# Altium PCB PCB.PcbDoc
Units mm, origin at the board's own origin, x right, y up, seen from the top; angles counter-clockwise.
Board outline 48 x 48 mm, 2 copper layers (Top Layer, Bottom Layer); 43 components, 54 nets, 273 pads, 391 vias.
Unrouted connection lines stored in the file: 1.
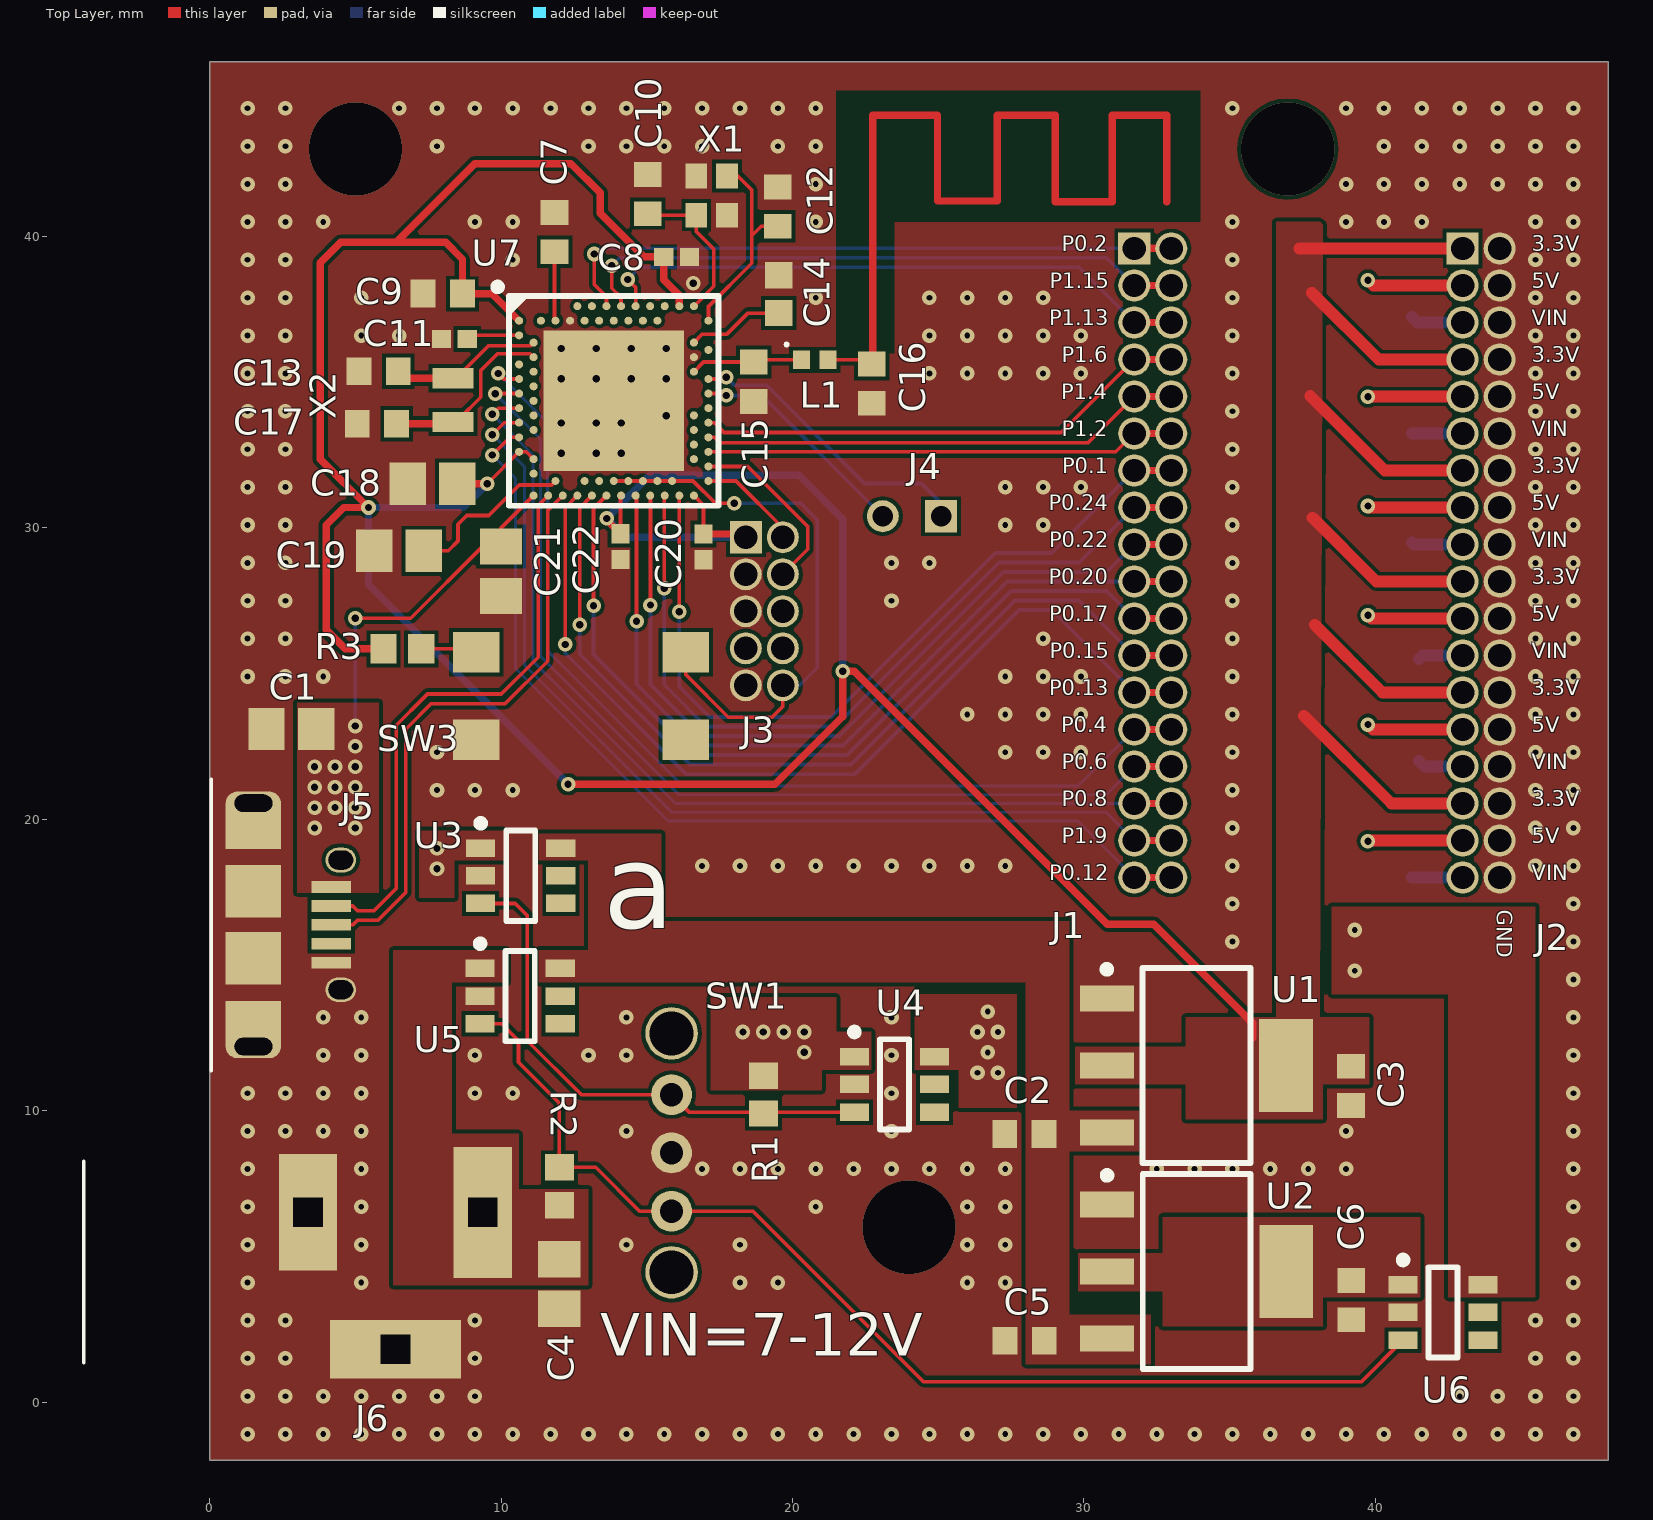
[diagram p0: Top Layer view]
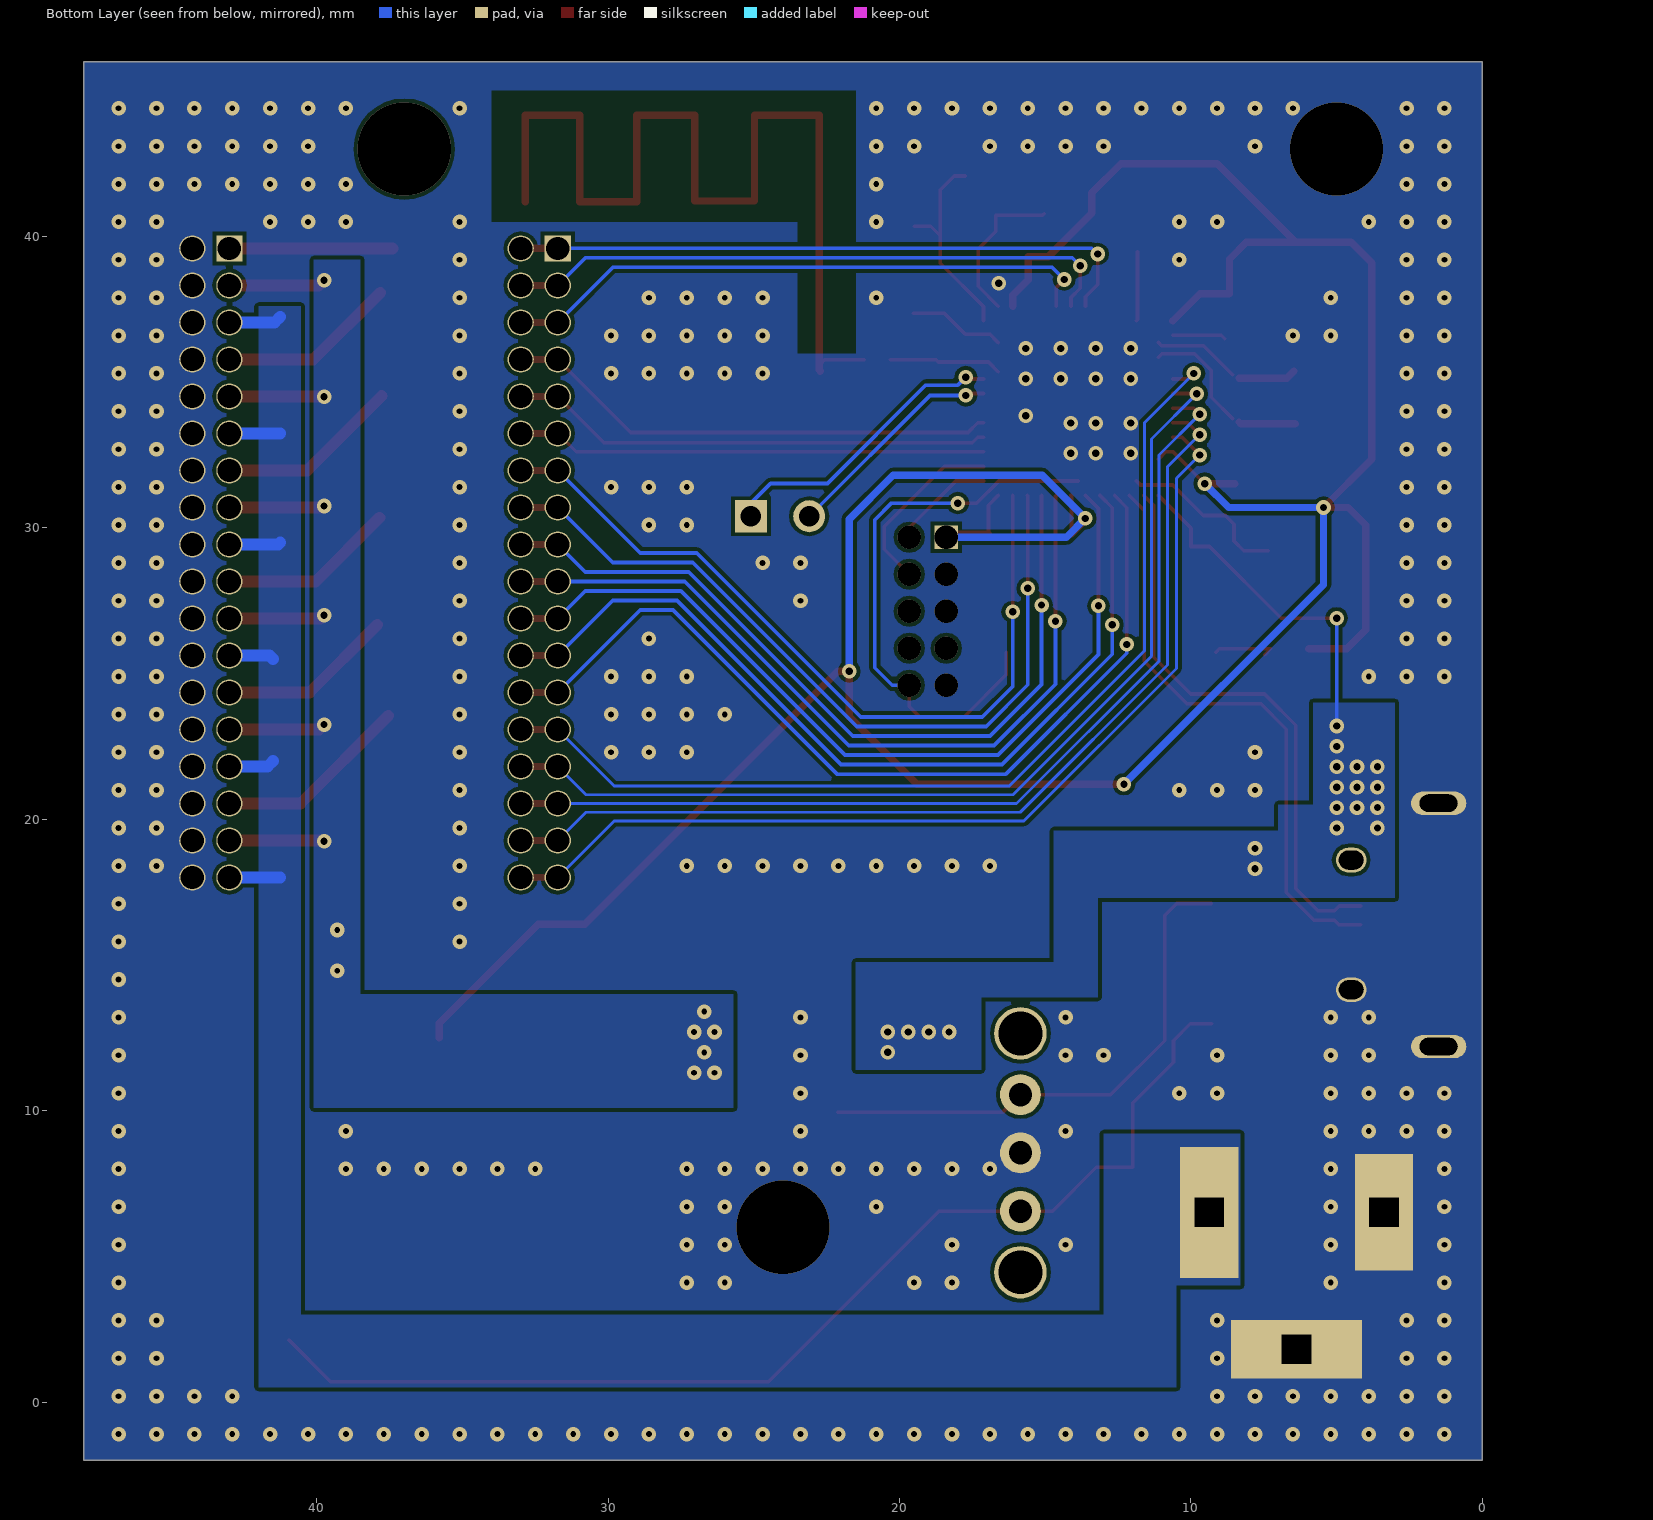
[diagram p1: Bottom Layer view, seen from below]
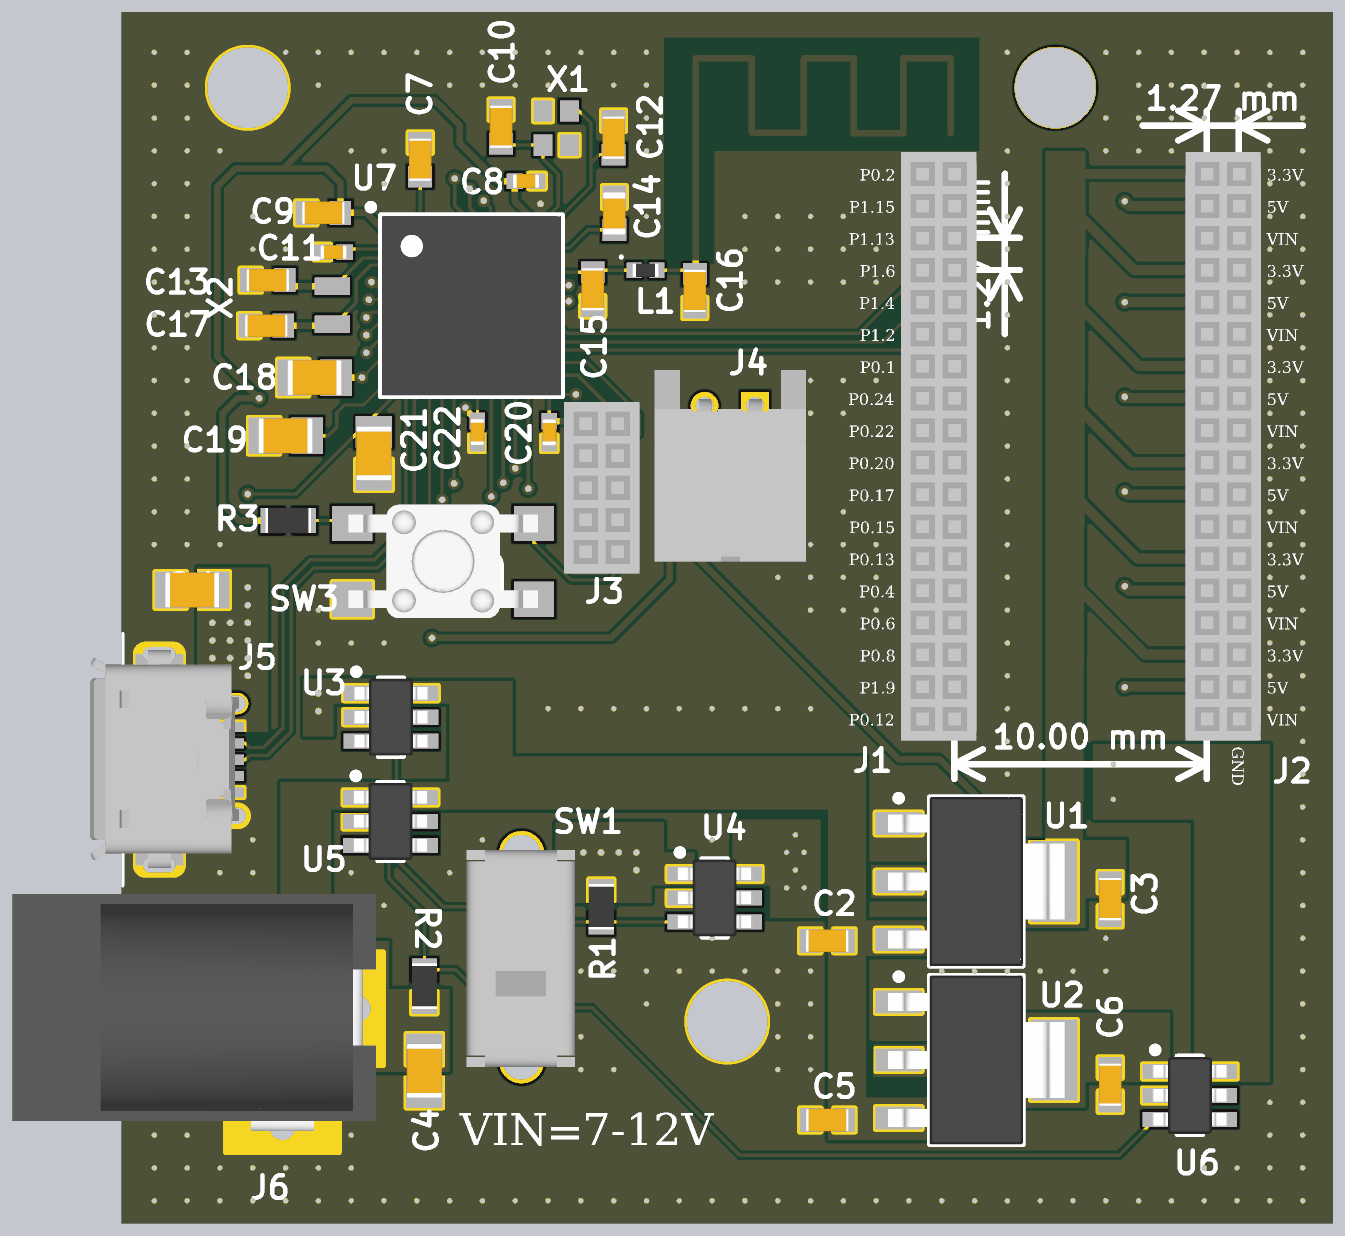
[diagram p2: 3D render of the assembled board from above, using the file's embedded part models]

## Layer stack, top to bottom
Top Solder: solder mask 0.0102, Solder Resist, Dk 3.5
Top Layer: signal copper 0.0356
Dielectric 1: dielectric 0.32, FR-4, Dk 4.8
Bottom Layer: signal copper 0.0356
Bottom Solder: solder mask 0.0102, Solder Resist, Dk 3.5

## Board outline
0,-2 48,-2 48,46 0,46

## Design rules (kind name [scope] priority, off if disabled: settings)
Clearance [All] p1: gap=0.127 ignorepadtopadclearanceinfootprint=FALSE except(0: Arc-Hole Track-Hole SMDPad-Hole THPad-Hole Via-Hole Fill-Hole Poly-Hole Region-Hole Text-Hole)
DiffPairsRouting [All] p1: maxlimit=0.2 minlimit=0.127 mostfreqgap=0.2 toplayer_minwidth=0.127 toplayer_maxwidth=0.2 toplayer_prefwidth=0.2 bottomlayer_minwidth=0.127 bottomlayer_maxwidth=0.2 bottomlayer_prefwidth=0.2 maxuncoupledlength=12.7
PlaneConnect [All] p1: planeconnectstyle=Direct reliefexpansion=0.508 reliefentries=4 reliefconductorwidth=0.254 reliefairgap=0.254
PolygonConnect [All] p1: connectstyle=Direct reliefconductorwidth=0.254 reliefentries=4 polygonreliefangle="90 Angle" airgapwidth=0.254
RoutingVias [All] p1: holewidth=0.25 width=0.5 viastyle="Through Hole" minholewidth=0.2 minwidth=0.45 maxholewidth=0.711 maxwidth=1.27
SolderMaskExpansion [All] p1: expansion=0.102
Width [All] p1: maxlimit=0.4 minlimit=0.089 preferedwidth=0.1
28 further rules are at their usual default settings.

## Classes and differential pairs
net class NFC: NFC_N NFC_P
net class P1.[0..15]: P1.1 P1.2 P1.3 P1.4 P1.5 P1.6 P1.7 P1.9 P1.10 P1.11 P1.12 P1.13 P1.14 P1.15
net class ANT: ANT
component class uController: C7 C8 C9 C10 C11 C12 C13 C14 C15 C16 C17 C18 C19 C20 C21 C22 L1 R3 SW3 U7 X1 X2
component class Power: C1 C2 C3 C4 C5 C6 J5 J6 R1 R2 SW1 U1 U2 U3 U4 U5 U6
component class Output: J1 J2 J3 J4
net class P0.[0..31]: P0.0 P0.1 P0.2 P0.3 P0.4 P0.5 P0.6 P0.7 P0.8 P0.9 P0.10 P0.11 P0.12 P0.13 P0.14 P0.15 P0.16 P0.17 P0.18 P0.19 P0.20 P0.21 P0.22 P0.23 P0.24 P0.25 P0.26 P0.27 P0.28 P0.29 P0.30 P0.31
net class USB: USB_N USB_P
differential pair NFC: +NFC_P -NFC_N
differential pair USB: +USB_P -USB_N

## Components (designator, comment, footprint, x,y, rotation, side; value= is the part's Value field where it differs from the comment)
C1 "CL21A475KAQNNNE" CAPC2013X14N 2.8,23.1 r0 top value=4.7uF
C2 "CL10A105KA8NNNC" CAPC1608X09N_2 27.962,9.2 r0 top value=1uF
C3 "CL10A105KA8NNNC" CAPC1608X09N_2 39.171,10.85 r90 top value=1uF
C4 "CL21A475KAQNNNE" CAPC2013X14N 12,4.05 r90 top value=4.7uF
C5 "CL10A105KA8NNNC" CAPC1608X09N_2 27.966,2.1 r0 top value=1uF
C6 "CL10A105KA8NNNC" CAPC1608X09N_2 39.175,3.5 r90 top value=1uF
C7 "CL10A105KA8NNNC" CAPC1608X09N_2 11.835,40.15 r270 top value=1uF
C8 "CL05A104KA5NNNC" CAPC1005X06N 16.025,39.3 r0 top value=100nF
C9 "CL10A105KA8NNNC" CAPC1608X09N_2 8,38.042 r0 top value=1uF
C10 "CL10C120JB8NNNC" CAPC1608X09N_2 15.038,41.454 r90 top value=12pF
C11 "CL05A104KA5NNNC" CAPC1005X06N 8.4,36.488 r180 top value=100nF
C12 "CL10C120JB8NNNC" CAPC1608X09N_2 19.5,41.025 r90 top value=12pF
C13 "CL10C120JB8NNNC" CAPC1608X09N_2 5.796,35.375 r0 top value=12pF
C14 "885012206028" CAPC1608X09N 19.525,38.021 r90 top value=100pF
C15 "CL10C0R8BB8NNNC" CAPC1608X09N_2 18.671,35.016 r90 top value=0.8pF
C16 "CL10C0R5BB8NNNC" CAPC1608X09N_2 22.717,34.95 r270 top value=0.5pF
C17 "CL10C120JB8NNNC" CAPC1608X09N_2 5.739,33.571 r0 top value=12pF
C18 "CL21A475KAQNNNE" CAPC2013X14N 7.65,31.516 r0 top value=4.7uF
C19 "CL21A475KAQNNNE" CAPC2013X14N 6.5,29.212 r0 top value=4.7uF
C20 "CL05A104KA5NNNC" CAPC1005X06N 16.95,29.35 r270 top value=100nF
C21 "CL21A475KAQNNNE" CAPC2013X14N 10,28.512 r90 top value=4.7uF
C22 "CL05A104KA5NNNC" CAPC1005X06N 14.1,29.355 r270 top value=100nF
J1 "20021311-00036T4LF" DIP36 31.73,39.59 r0 top
J2 "20021311-00036T4LF" DIP36 43,39.59 r0 top
J3 "20021311-00010T4LF" DIP10 18.4,29.678 r0 top
J4 "0894010210" DIP2 25.1,30.4 r180 top
J5 "47589-0001" USB 0.05,16.375 r270 top
J6 "PJ-202B" POWER_JACK 9.875,8.257 r180 top
L1 "CIH05T3N3SNC" INDC1005X06N 20.763,35.769 r0 top value=3.3nH
R1 "RR0816P-103-D" RESC1608X05N 19.004,10.55 r90 top value=10k
R2 "RR0816P-103-D" RESC1608X05N 12,7.404 r270 top value=10k
R3 "RR0816P-103-D" RESC1608X05N 6.612,25.85 r180 top value=10k
SW1 "OS102011MS2QN1" DIP5-SW 15.85,10.55 r270 top
SW3 "EG5350TR-ND" SW1 8.343,22.031 r0 top
U1 "AZ1117EH-3.3TRG1" SOT230P700X180-4N 33.866,11.55 r0 top
U2 "AZ1117EH-5.0TRG1" SOT230P700X180-4N 33.871,4.479 r0 top
U3 "TPS22810DBVR" SOT23127P600-8N-TPS22810DBVR 10.675,18.06 r0 top
U4 "TPS22810DBVR" SOT23127P600-8N-TPS22810DBVR 23.5,10.9 r0 top
U5 "TPS22810DBVR" SOT23127P600-8N-TPS22810DBVR 10.656,13.931 r0 top
U6 "TPS22810DBVR" SOT23127P600-8N-TPS22810DBVR 42.329,3.075 r0 top
U7 "NRF52840-QIAA-R" AQFN50P700X700X85_HS-74N 13.867,34.359 r0 top
X1 "NX2016SA-32MHZ-EXS00A-CS11336" OSC1 18.125,40.304 r90 top value=32MHz
X2 "Q0,032768-JTX210-9-20-T1-80K-LF" OSC2 9.05,33.283 r90 top value=32.768kHz

## Footprints (in the part's own frame and the unit in brackets; to place one, negate y for a bottom-side part, rotate by r counter-clockwise, add the part's x,y. Pads: shape width x height; smd on the part's side, far side on the other; paste and mask are expansions set on the pad)
AQFN50P700X700X85_HS-74N [mm]
  round 0.275 smd paste+0.012 mask+0.05: A8(-1.25,3.25) A10(-0.75,3.25) A12(-0.25,3.25) A14(0.25,3.25) A16(0.75,3.25) A18(1.25,3.25) A20(1.75,3.25) A22(2.25,3.25) A23(2.75,3.25) AA24(3.25,-2.25) AB2(-2.75,-2.5) AC5(-2,-2.75) AC9(-1,-2.75) AC11(-0.5,-2.75) AC13(0,-2.75) AC15(0.5,-2.75) AC17(1,-2.75) AC19(1.5,-2.75) AC21(2,-2.75) AC24(3.25,-2.75) AD2(-2.75,-3.25) AD4(-2.25,-3.25) AD6(-1.75,-3.25) AD8(-1.25,-3.25) AD10(-0.75,-3.25) AD12(-0.25,-3.25) AD14(0.25,-3.25) AD16(0.75,-3.25) AD18(1.25,-3.25) AD20(1.75,-3.25) AD22(2.25,-3.25) AD23(2.75,-3.25) B1(-3.25,2.75) B3(-2.5,2.75) B5(-2,2.75) B7(-1.5,2.75) B9(-1,2.75) B11(-0.5,2.75) B13(0,2.75) B15(0.5,2.75) B17(1,2.75) B19(1.5,2.75) B24(3.25,2.75) C1(-3.25,2.25) D2(-2.75,2) D23(2.75,2) E24(3.25,1.75) F2(-2.75,1.5) F23(2.75,1.5) G1(-3.25,1.25) H2(-2.75,1) H23(2.75,1) J1(-3.25,0.75) J24(3.25,0.75) K2(-2.75,0.5) L1(-3.25,0.25) L24(3.25,0.25) M2(-2.75,0) N1(-3.25,-0.25) N24(3.25,-0.25) P2(-2.75,-0.5) P23(2.75,-0.5) R1(-3.25,-0.75) R24(3.25,-0.75) T2(-2.75,-1) T23(2.75,-1) U1(-3.25,-1.25) U24(3.25,-1.25) V23(2.75,-1.5) W1(-3.25,-1.75) W24(3.25,-1.75) Y2(-2.75,-2) Y23(2.75,-2)
  rect 4.83x4.83 smd mask+0.05: B7(0,0)
  silkscreen extent -4.11,-3.6 3.6,4.04, body extent -3.55,-3.55 3.55,3.55, height 0.85
CAPC1005X06N [mm] "Chip Capacitor, 2-Leads, Body 1,00x0,50mm, IPC Medium Density"
  rect 0.66x0.62 smd: 1(-0.44,0) 2(0.44,0)
  body extent -0.53,-0.28 0.53,0.28, height 0.55
CAPC1608X09N [mm] "Chip Capacitor, 2-Leads, Body 1,60x0,80mm, IPC Medium Density"
  rect 0.9x0.95 smd: 1(-0.65,0) 2(0.65,0)
  body extent -0.85,-0.45 0.85,0.45, height 0.87
CAPC1608X09N_2 [mm] "Chip Capacitor, 2-Leads, Body 1,60x0,80mm, IPC Medium Density"
  rect 0.85x0.95 smd: 1(-0.675,0) 2(0.675,0)
  body extent -0.85,-0.45 0.85,0.45, height 0.9
CAPC2013X14N [mm] "Chip Capacitor, 2-Leads, Body 2,00x1,27mm, IPC Medium Density"
  rect 1.25x1.45 smd: 1(-0.85,0) 2(0.85,0)
  body extent -1.07,-0.7 1.07,0.7, height 1.4
DIP2 [mm]
  rect 1.1x1.1 / inner rect 2.5x1.2 / far side rect 1.1x1.1 hole 0.7: 1(0,0)
  round 1.1 / inner oval 2.5x1.2 / far side round 1.1 hole 0.7: 2(2,0)
  body extent -2.02,-1.43 3.97,6.18, height 5.02
DIP5-SW [mm]
  round 1.4 hole 0.8: 1(0,0) 2(2,0) 3(4,0)
  round 1.8 hole 1.5: M(-2.1,0) M(6.1,0)
  body extent -2.25,-2.18 6.35,2.12, height 8.7
DIP10 [mm]
  rect 1.1x1.1 / inner rect 2.5x1.2 / far side rect 0.8x0.8 hole 0.8: 1(0,0)
  round 1.1 / inner oval 2.5x1.2 / far side round 0.8 hole 0.8: 2(0,-1.27) 3(0,-2.54) 4(0,-3.81) 5(0,-5.08) 6(1.27,-5.08) 7(1.27,-3.81) 8(1.27,-2.54) 9(1.27,-1.27) 10(1.27,0)
  body extent -0.88,-5.93 2.13,0.88, height 4.3
DIP36 [mm]
  rect 1.1x1.1 / inner rect 2.5x1.2 / far side rect 0.9x0.9 hole 0.8: 1(0,0)
  round 1.1 / inner oval 2.5x1.2 / far side round 0.9 hole 0.8: 2(0,-1.27) 3(0,-2.54) 4(0,-3.81) 5(0,-5.08) 6(0,-6.35) 7(0,-7.62) 8(0,-8.89) 9(0,-10.16) 10(0,-11.43) 11(0,-12.7) 12(0,-13.97) 13(0,-15.24) 14(0,-16.51) 15(0,-17.78) 16(0,-19.05) 17(0,-20.32) 18(0,-21.59) 19(1.27,-21.59) 20(1.27,-20.32) 21(1.27,-19.05) 22(1.27,-17.78) 23(1.27,-16.51) 24(1.27,-15.24) 25(1.27,-13.97) 26(1.27,-12.7) 27(1.27,-11.43) 28(1.27,-10.16) 29(1.27,-8.89) 30(1.27,-7.62) 31(1.27,-6.35) 32(1.27,-5.08) 33(1.27,-3.81) 34(1.27,-2.54) 35(1.27,-1.27) 36(1.27,0)
  body extent -0.85,-22.46 2.15,0.86, height 4.3
INDC1005X06N [mm] "Chip Inductor, 2-Leads, Body 1,00x0,50mm, IPC Medium Density"
  rect 0.59x0.62 smd: 1(-0.455,0) 2(0.455,0)
  silkscreen extent -1.01,0.47 -0.91,0.57, body extent -0.53,-0.28 0.53,0.28, height 0.55
OSC1 [mm]
  rect 0.85x0.75 smd: 1(0.425,0.375) 2(1.775,0.375) 3(1.775,1.425) 4(0.425,1.425)
OSC2 [mm]
  rect 0.7x1.4 smd: 1(0.35,0.7) 2(1.85,0.7)
POWER_JACK [mm]
  rect 2x4.5 hole 1 square unplated: 1(0.5,1.75)
  rect 2x4 hole 1 square unplated: 2(6.5,1.75)
  rect 4.5x2 hole 1 square unplated: 3(3.5,6.45)
  silkscreen extent 14.2,0 14.2,6.9, body extent -0.2,-2.8 14.2,6.6, height 11
RESC1608X05N [mm] "Chip Resistor, 2-Leads, Body 1,60x0,80mm, IPC Medium Density"
  rect 0.9x1 smd: 1(-0.65,0) 2(0.65,0)
  body extent -0.9,-0.5 0.9,0.5, height 0.5
SOT230P700X180-4N [mm] "SOT223, 4-Leads, Body 6,50x7,00mm (avg), Pitch 2,30mm, IPC Medium Density"
  rect 1.85x0.9 smd: 1(-3.075,2.3) 2(-3.075,0) 3(-3.075,-2.3)
  rect 1.85x3.2 smd: 2(3.075,0)
  silkscreen extent -3.2,-3.35 1.85,3.42, body extent -3.5,-3.35 3.5,3.35, height 1.8
SOT23127P600-8N-TPS22810DBVR [mm]
  rect 1x0.6 smd: 1(-1.375,0.95) 2(-1.375,0) 3(-1.375,-0.95) 4(1.375,-0.95) 5(1.375,0) 6(1.375,0.95)
  silkscreen extent -1.5,-1.55 0.5,1.92, body extent -1.49,-1.53 1.49,1.53, height 1.45
SW1 [mm]
  rect 1.6x1.4 smd: 1(0.8,0.7) 2(8,0.7) 3(0.8,3.7) 4(8,3.7)
  body extent 0.65,-0.05 8.15,4.45, height 3.7
USB [mm]
  rect 0.4x1.35 smd: 1(-1.3,4.125) 2(-0.65,4.125) 3(0,4.125) 4(0.65,4.125) 5(1.3,4.125)
  oval 0.8x1.9 hole 0.6 slot 1.3 at 90 deg unplated: 5(-4.175,1.45) 5(4.175,1.45)
  rect 1.575x1.9 smd: 5(-3.4,1.45) 5(3.4,1.45)
  oval 0.85x1.05 hole 0.65 slot 0.85 at 90 deg unplated: 5(-2.225,4.45) 5(2.225,4.45)
  rect 1.8x1.9 smd: 5(-1.15,1.45) 5(1.15,1.45)
  silkscreen extent -5,0 5,0, body extent -4.35,-1.29 4.3,4.6, height 2.86

## Part data
C1 C4 C18 C19 C21: "Cap Ceramic 4.7uF 25V X5R 10% SMD 0805 85C Embossed T/R", Capacitance=4.7uF, Case/Package=0805, Case Code (Metric)=2012, Dielectric=X5R, Manufacturer=Samsung, Max Operating Temperature=85°C, Min Operating Temperature=-55°C, Package Quantity=1, Supplier Part Number 1=1276-1244-1-ND, Tolerance=10%, Voltage Rating=25V, Case Code (Imperial)=0805, Depth=1.25mm, Height=1.25mm, Lead Free="Lead Free", Length=2mm, Manufacturer Part Number=CL21A475KAQNNNE, Mount="Surface Mount", Packaging="Tape and Reel", Pricing 1="1=0.23, 10=0.158, 100=0.0802, 500=0.0549, 1000=0.0485 (USD)", Radiation Hardening=No, Stock 1=20000, Supplier 1=Digi-Key, Thickness=0.055inch, Voltage Rating (DC)=25V, Width=0.049inch
C2 C3 C5 C6 C7 C9: "Cap Ceramic 1uF 25V X5R 10% SMD 0603 85C Paper T/R", Capacitance=1uF, Case/Package=0603, Case Code (Metric)=1608, Dielectric=X5R, Manufacturer=Samsung, Max Operating Temperature=85°C, Min Operating Temperature=-55°C, Package Quantity=1, Supplier Part Number 1=1276-1102-1-ND, Tolerance=10%, Voltage=25V, Case Code (Imperial)=0603, Contact Plating=Tin, Depth=0.8mm, Height=0.8mm, Lead Free="Lead Free", Length=1.6mm, Manufacturer Part Number=CL10A105KA8NNNC, Material=Ceramic, Mount="Surface Mount", Packaging="Tape and Reel", Pricing 1="1=0.1, 10=0.052, 100=0.0231, 500=0.0165, 1000=0.013 (USD)", Radiation Hardening=No, Stock 1=40000, Supplier 1=Digi-Key, Thickness=0.035inch, Voltage Rating=25V, Voltage Rating (DC)=25V, Width=0.031inch
C8 C11 C20 C22: "Cap Ceramic 0.1uF 25V X5R 10% SMD 0402 85C Paper T/R", Capacitance=100nF, Case/Package=0402, Case Code (Metric)=1005, Dielectric=X5R, Manufacturer=Samsung, Max Operating Temperature=85°C, Min Operating Temperature=-55°C, Package Quantity=1, Supplier Part Number 1=1276-1043-1-ND, Tolerance=10%, Voltage=25V, Case Code (Imperial)=0402, Depth=0.5mm, Height=0.5mm, Lead Free="Lead Free", Length=1mm, Manufacturer Part Number=CL05A104KA5NNNC, Mount="Surface Mount", Packaging="Tape and Reel", Pricing 1="1=0.1, 10=0.04, 100=0.0176, 500=0.0126, 1000=0.0099, 2500=0.009, 5000=0.0083 (USD)", Radiation Hardening=No, Stock 1=100000, Supplier 1=Digi-Key, Thickness=0.022inch, Voltage Rating=25V, Voltage Rating (DC)=25V, Width=0.02inch
C10 C12 C13 C17: "Cap Ceramic 12pF 50V C0G 5% SMD 0603 125C Paper T/R", Capacitance=12pF, Case/Package=0603, Case Code (Metric)=1608, Dielectric=C0G, Manufacturer=Samsung, Max Operating Temperature=125°C, Min Operating Temperature=-55°C, Package Quantity=1, Supplier Part Number 1=1276-1254-1-ND, Temperature Coefficient=300ppm/°C, Tolerance=5%, Voltage=50V, Case Code (Imperial)=0603, Contact Plating=Tin, Depth=0.8mm, Height=0.8mm, Lead Free="Lead Free", Length=1.6mm, Manufacturer Part Number=CL10C120JB8NNNC, Material=Ceramic, Mount="Surface Mount", Packaging="Tape and Reel", Pricing 1="1=0.1, 10=0.07, 100=0.0314, 500=0.0224, 1000=0.0176 (USD)", Radiation Hardening=No, Stock 1=40000, Supplier 1=Digi-Key, Thickness=0.035inch, Voltage Rating=50V, Voltage Rating (DC)=50V, Width=0.031inch
C14: "Wurth Elektronik 0603 WCAP-CSGP 100pF Ceramic Multilayer Capacitor, 16 V dc, +125°C, X7R Dielectric, ±10%", Capacitance=100pF, Case/Package=0603, Case Code (Metric)=1608, Manufacturer="Wurth Electronics", Max Operating Temperature=125°C, Min Operating Temperature=-55°C, Supplier Part Number 1=732-7947-1-ND, Tolerance=10%, Voltage Rating=16V, Case Code (Imperial)=0603, Length=0.063inch, Manufacturer Part Number=885012206028, Mount="Surface Mount", Packaging="Tape and Reel", Pricing 1="1=0.1, 10=0.021, 100=0.0192, 500=0.017 (USD)", Stock 1=4208, Supplier 1=Digi-Key, Thickness=0.034inch, Width=0.031inch
C15: "Cap Ceramic 0.8pF 50V C0G 0.1pF SMD 0603 125C Paper T/R", Capacitance=0.8pF, Case/Package=0603, Case Code (Metric)=1608, Dielectric=C0G, Manufacturer=Samsung, Max Operating Temperature=125°C, Min Operating Temperature=-55°C, Package Quantity=1, Supplier Part Number 1=1276-2148-1-ND, Voltage Rating=50V, Case Code (Imperial)=0603, Depth=0.8mm, Height=0.8mm, Length=1.6mm, Manufacturer Part Number=CL10C0R8BB8NNNC, Mount="Surface Mount", Packaging="Tape and Reel", Pricing 1="1=0.1, 10=0.059, 100=0.0264, 500=0.0189, 1000=0.0148 (USD)", Radiation Hardening=No, Stock 1=40000, Supplier 1=Digi-Key, Thickness=0.035inch, Voltage Rating (DC)=50V, Width=0.031inch
C16: "Cap Ceramic 0.5pF 50V C0G 0.1pF SMD 0603 125C Paper T/R", Capacitance=0.5pF, Case/Package=0603, Case Code (Metric)=1608, Dielectric=NP0, Manufacturer=Samsung, Max Operating Temperature=125°C, Min Operating Temperature=-55°C, Package Quantity=1, Supplier Part Number 1=1276-1818-1-ND, Temperature Coefficient=300ppm/°C, Voltage=50V, Case Code (Imperial)=0603, Contact Plating=Matte,Tin, Depth=0.8mm, Height=0.8mm, Length=1.6mm, Manufacturer Part Number=CL10C0R5BB8NNNC, Material=Ceramic, Mount="Surface Mount", Packaging="Tape and Reel", Pricing 1="1=0.1, 10=0.049, 100=0.0217, 500=0.0155, 1000=0.0122 (USD)", Radiation Hardening=No, Stock 1=28897, Supplier 1=Digi-Key, Thickness=0.035inch, Voltage Rating=50V, Width=0.031inch
J1 J2: "36 Position Receptacle Connector 0.050\" (1.27mm) Through Hole Gold", Colour=Black, Contact Resistance=30mR, Current Rating=1A, Manufacturer="Amphenol FCI", Max Operating Temperature=85°C, Max Voltage Rating (AC)=125V, Min Operating Temperature=-40°C, Package Quantity=25, Supplier Part Number 1=609-3765-ND, Checked=false, Connector Type=Receptacle,Socket, Contact Material="Copper Alloy", Contact Plating=Gold, Depth=3mm, Gender=Female, Housing Material=Plastic, Length=21.59mm, Manufacturer Part Number=20021311-00036T4LF, Mount="Through Hole", Number of Contacts=36, Number of Positions=36, Number of Rows=2, Orientation=Straight, Packaging=Rail/Tube, Pitch=1.27mm, Pricing 1="1=2.66, 25=2.3368, 100=2.1242, 500=1.8056, 1000=1.5401, 5000=1.3807 (USD)", Row Spacing=0.05inch, Stock 1=859, Supplier 1=Digi-Key, Termination=Solder, Voltage Rating=125V
J3: "10 Position Receptacle Connector 0.050\" (1.27mm) Through Hole Gold", Colour=Black, Contact Resistance=30mR, Current Rating=1A, Flammability Rating="UL94 V-0", Insulation Resistance=1GR, Manufacturer="Amphenol FCI", Max Operating Temperature=125°C, Max Voltage Rating (AC)=125V, Min Operating Temperature=-55°C, Package Quantity=86, Supplier Part Number 1=609-3754-ND, Checked=False, Connector Type=Receptacle,Socket, Contact Gender=Male, Contact Material="Copper,Copper Alloy,Gold", Contact Plating=Gold, Depth=3mm, Gender=Receptacle, Housing Material=Thermoplastic, Lead Free="Lead Free", Length=5.08mm, Manufacturer Part Number=20021311-00010T4LF, Mount="Through Hole", Number of Contacts=10, Number of Positions=10, Number of Rows=2, Orientation=Straight, Packaging=Rail/Tube, Pitch=1.27mm, Pricing 1="1=1.03, 86=0.8154, 172=0.7799, 516=0.6381, 1032=0.5672, 5074=0.4963, 10062=0.4715 (USD)", REACH SVHC="No SVHC", Row Spacing=0.05inch, Stock 1=21801, Supplier 1=Digi-Key, Termination=Solder, Termination Post Length=2.4mm, Voltage Rating=125V
J4: "Conn Shrouded Header HDR 2 POS 2mm Solder RA Thru-Hole Bag", Colour=Natural, Manufacturer=Molex, Max Operating Temperature=85°C, Min Operating Temperature=-25°C, Package Quantity=9000, Supplier Part Number 1=WM14854-ND, Checked=False, Connector Type="Male Pin", Contact Material=Brass, Contact Plating=Copper,Tin, Depth=7.6mm, Housing Colour=Natural, Housing Material=Nylon, Length=6mm, Manufacturer Part Number=0894010210, Mount="Through Hole", Number of Contacts=2, Number of Positions=2, Number of Rows=1, Orientation="Right Angle", Packaging=Bulk, Pitch=2mm, Pricing 1="1=0.13, 10=0.123, 100=0.0757, 500=0.0626, 1000=0.0548, 5000=0.047, 10000=0.0457 (USD)", Radiation Hardening=No, Stock 1=9337, Supplier 1=Digi-Key, Termination=Solder
J5: "MOLEX         47589-0001            MICRO USB, 2.0 TYPE AB, RECEPTACLE, SMT", Colour=Black, Contact Resistance=40mR, Current Rating=1.8A, Manufacturer=Molex, Max Operating Temperature=85°C, Max Voltage Rating (AC)=100V, Min Operating Temperature=-20°C, Supplier Part Number 1=WM17143CT-ND, Voltage Rating=30V, Checked=False, Connector Type=Receptacle,USB, Contact Material="Copper,Copper Alloy", Contact Plating=Gold, Gender=Female, Height=0.25inch, Housing Material=Polymer, Length=8.65mm, Manufacturer Part Number=47589-0001, Mount="PCB,Surface Mount", Number of Contacts=5, Number of Ports=1, Number of Terminals=5, Orientation="Right Angle", Packaging="Tape and Reel", Pitch=0.65mm, Pricing 1="1=0.74, 10=0.649, 25=0.6108, 50=0.5854, 100=0.56, 250=0.5091, 500=0.4582 (USD)", Radiation Hardening=No, REACH SVHC=Unknown, Stock 1=66825, Supplier 1=Digi-Key, Termination=Solder, USB Standard="USB 2.0", Voltage Rating (AC)=30V, Weight=0.01lb, Width=0.25inch
J6: "PJ-202 Series 2.5 x 6.5 mm 16 V Horizontal Power Jack w/ Kinked Pins", Colour=Black, Current Rating=2.5A, Flammability Rating="UL94 V-0", Insulation Resistance=100MR, Manufacturer=CUI, Max Operating Temperature=85°C, Min Operating Temperature=-25°C, Package Quantity=500, Supplier Part Number 1=CP-202B-ND, Voltage Rating=24V, Connector Type=Jack, Contact Gender=Male, Contact Material=Copper, Contact Plating=Nickel, Diameter=2.5mm, Gender=Male, Housing Colour=Black, Housing Material=Thermoplastic, Lead Free="Lead Free", Manufacturer Part Number=PJ-202B, Mount="Through Hole", Number of Conductors=2, Orientation=Horizontal, Packaging=Bulk, Pricing 1="1=0.61, 10=0.57, 25=0.5132, 50=0.456, 100=0.437, 250=0.399, 500=0.38, 1000=0.3135, 2500=0.285 (USD)", Shielding=Unshielded, Stock 1=39597, Supplier 1=Digi-Key, Termination="Through Hole"
L1: "Inductor High Frequency Chip Multi-Layer 3.3nH 0.3nH 100MHz 8Q-Factor Ceramic 300mA 190mOhm DCR 0402 T/R", Case/Package=0402, Case Code (Metric)=1005, Current Rating=300mA, DC Resistance (DCR)=190mR, Inductance=3.3nh, Manufacturer=Samsung, Max Operating Temperature=125°C, Min Operating Temperature=-55°C, Self Resonant Frequency=6GHz, Supplier Part Number 1=1276-6294-1-ND, Test Frequency=100MHz, Case Code (Imperial)=0402, Core Material=Ceramic, DC Current=300mA, Depth=0.55mm, Height=0.55mm, Lead Free="Lead Free", Length=0.039inch, Manufacturer Part Number=CIH05T3N3SNC, Max DC Current=300mA, Military Standard=Not, Mount="Surface Mount", Packaging="Cut Tape", Pricing 1="1=0.1, 10=0.015, 100=0.0102, 500=0.0082, 1000=0.007, 2500=0.0063 (USD)", Radiation Hardening=No, Shielding=Unshielded, Stock 1=68140, Supplier 1=Digi-Key, Width=0.02inch
R1 R2 R3: "RES SMD 10K OHM 0.5% 1/16W 0603", Manufacturer=Susumu, Operating Temperature="-55°C ~ 125°C", Package / Case="0603 (1608 Metric)", Power (Watts)="0.063W, 1/16W", Supplier Device Package=-, Supplier Part Number 1=RR08P10.0KDCT-ND, Temperature Coefficient=±25ppm/°C, Tolerance=±0.5%, Category=Resistors, ComponentLink1Description=http://www.susumu.co.jp/common/pdf/n_catalog_partition05_en.pdf, ComponentLink1URL=http://www.susumu.co.jp/common/pdf/n_catalog_partition05_en.pdf, Composition="Thin Film", Failure Rate=-, Features=-, Height - Seated (Max)="0.020\" (0.50mm)", Manufacturer Part Number=RR0816P-103-D, Packaging="Cut Tape (CT)", Part Status=Active, Pricing 1="1=0.09, 10=0.084, 100=0.0321, 1000=0.01412, 2500=0.01219 (EUR)", RoHS="RoHS Compliant", Size / Dimension="0.063\" L x 0.032\" W (1.60mm x 0.80mm)", Stock 1=362461, Supplier 1=Digi-Key
SW1: "C & K COMPONENTS         OS102011MS2QN1             Slide Switch, SPDT, On-On, Through Hole, OS Series, 100 mA", Contact Current Rating=100mA, Contact Resistance=20mR, Insulation Resistance=100MR, Manufacturer="ITT C&K", Max Operating Temperature=70°C, Max Voltage Rating (DC)=12V, Min Operating Temperature=-30°C, Package Quantity=300, Supplier Part Number 1=CKN9565-ND, Actuator Length=4mm, Actuator Material=Acetal,Polyacetal,Polyoxymethylene, Actuator Type=Standard, Contact Material="Brass,Copper Alloy,Silver", Contact Plating=Gold,Silver, Contact Style=Non-Shorting, Current Rating=100mA, Depth=4.3mm, Electrical Life=10000Cycles, Housing Material=Resin, Lead Free="Lead Free", Length=8.6mm, Manufacturer Part Number=OS102011MS2QN1, Max Current Rating=100mA, Mechanical Life=10000Cycles, Mount="PCB,Through Hole", Orientation=Vertical, Packaging=Bulk, Pricing 1="1=0.43, 10=0.413, 25=0.4048, 50=0.3616, 100=0.3444, 250=0.3358, 500=0.2841, 1000=0.2755, 5000=0.2411 (USD)", Radiation Hardening=No, REACH SVHC="No SVHC", Stock 1=29366, Supplier 1=Digi-Key, Switch Function=On-On, Switch Travel=2mm, Termination="PC Pins", Throw Configuration=SPDT, Voltage Rating (DC)=12V
SW3: library part TL3305AF160QG, "SWITCH TACTILE SPST-NO 50MA 12V", Contact Rating @ Voltage="0.05A @ 12VDC", Illumination Type, Color=-, Manufacturer=E-Switch, Operating Force=160gf, Operating Temperature="-20°C ~ 70°C", Actuator Height off PCB, Vertical=3.80mm, Actuator Length, Right Angle=-, Actuator Material=-, Actuator Orientation="Top Actuated", Actuator Type=Standard, Category=Switches, Checked=0, Circuit=SPST-NO, ComponentLink1Description=http://spec_sheets.e-switch.com/specs/P010468.pdf, ComponentLink1URL=http://spec_sheets.e-switch.com/specs/P010468.pdf, Features=-, Illumination=Non-Illuminated, Illumination Voltage (Nominal)=-, Ingress Protection=-, Manufacturer Part Number=TL3305AF160QG, Mechanical Life="500,000 Cycles", Mounting Type="Surface Mount", Outline="4.50mm x 4.50mm", Packaging="Tape & Reel (TR)", Part Status=Active, Pricing 1="2000=0.08803, 6000=0.07294 (EUR)", RoHS="RoHS Compliant", Stock 1=50000, Supplier 1=Digi-Key, Supplier Part Number 1=EG5350TR-ND, Switch Function=Off-Mom, Switch Travel=0.20mm, Termination Style="Gull Wing"
U1: "LDO Voltage Regulators LDO BJT HiCurr", Case/Package=TO-261-4, Dropout Voltage=1.1V, Manufacturer=Diodes, Max Input Voltage=13V, Max Operating Temperature=125°C, Max Output Current=1A, Min Operating Temperature=-40°C, Operating Supply Current=3.5mA, Output Voltage=3.3V, Package Quantity=4000, Power Supply Rejection Ratio (PSRR)=70dB, Reference Voltage=1.262V, Supplier Part Number 1=AZ1117EH-3.3TRG1DICT-ND, Accuracy=1%, Contact Plating=Tin, Lead Free="Lead Free", Manufacturer Part Number=AZ1117EH-3.3TRG1, Mount="Surface Mount", Number of Outputs=1, Number of Pins=3, Number of Regulators=1, Output Current=1A, Output Type=Fixed, Packaging="Tape and Reel", Polarity=Positive, Pricing 1="1=0.43, 10=0.321, 100=0.1815, 500=0.1202, 1000=0.0922 (USD)", Quiescent Current=3.5mA, Stock 1=97054, Supplier 1=Digi-Key, Weight=0.000282oz
U2: "LDO Voltage Regulators LDO BJT HiCurr 1A 1.15V to 12V", Case/Package=TO-261-4, Dropout Voltage=1.1V, Manufacturer=Diodes, Max Input Voltage=13V, Max Operating Temperature=125°C, Max Output Current=1A, Min Operating Temperature=-40°C, Operating Supply Current=3.5mA, Output Voltage=5V, Package Quantity=4000, Power Supply Rejection Ratio (PSRR)=70dB, Reference Voltage=1.262V, Supplier Part Number 1=AZ1117EH-5.0TRG1DICT-ND, Accuracy=1%, Manufacturer Part Number=AZ1117EH-5.0TRG1, Mount="Surface Mount", Number of Outputs=1, Number of Pins=3, Number of Regulators=1, Output Current=1A, Output Type=Fixed, Packaging="Tape and Reel", Polarity=Positive, Pricing 1="1=0.43, 10=0.321, 100=0.1815, 500=0.1202, 1000=0.0922 (USD)", Quiescent Current=3.5mA, Stock 1=41027, Supplier 1=Digi-Key, Weight=0.000282oz
U7: Manufacturer="Nordic Semiconductor", Supplier Part Number 1=1490-1071-1-ND, Manufacturer Part Number=NRF52840-QIAA-R, Pricing 1="1=7.43, 10=6.815, 25=6.1952, 100=5.5755, 250=5.1109, 500=4.6463, 1000=4.1816 (USD)", Stock 1=13083, Supplier 1=Digi-Key
X1: Manufacturer=NDK, Supplier Part Number 1=644-1324-1-ND, Manufacturer Part Number=NX2016SA-32MHZ-EXS00A-CS11336, Pricing 1="1=0.64, 10=0.531, 50=0.4776, 100=0.4246, 500=0.4034, 1000=0.3397 (USD)", Stock 1=2762, Supplier 1=Digi-Key
X2: Manufacturer=Jauch, Supplier Part Number 1=1908-1304-2-ND, Manufacturer Part Number=Q0,032768-JTX210-9-20-T1-80K-LF, Stock 1=0, Supplier 1=Digi-Key

## Via types
v1: diameter 0.5, hole 0.2, Top Layer to Bottom Layer, tented both sides, 322 vias
v2: diameter 0.5, hole 0.25, Top Layer to Bottom Layer, tented both sides, 51 vias
v3: diameter 0.5, hole 0.25, Top Layer to Bottom Layer, 15 vias
v4: diameter 3.2, hole 3.2, Top Layer to Bottom Layer, 3 vias

## Nets (pads, with @x,y where several pads share a name; then routed paths per layer and width w, separated by ;. In a path a pad name is that pad's centre, name@x,y a point inside that pad or via, vN(x,y) a via of type N, cw(c..) or ccw(c..) an arc to the next point about the centre after c; other vN are vias at no path point)
+3.3V: C3.2 C8.1 C9.2 C18.2 C20.1 C22.1 J2.1 J2.4 J2.7 J2.10 J2.13 J2.16 J3.1 R3.2 U1.2 U7.A22 U7.AD14 U7.AD23 U7.B1 U7.W1 U7.Y2 | length 152.3
  Top Layer w0.127: v2(9.525,31.516) U7.W1 10.867,32.609 U7.Y2 ; C22.1 14.1,31.092 U7.AD14 ; U7.AD23 16.95,30.776 C20.1
  Top Layer w0.254: R3.2 4.65,25.85 4,26.5 4,30.1 4.6,30.7 v2(5.45,30.7) 3.8,32.35 3.8,39.1 4.5,39.8 6.4,39.8 ; C18.2 v2(9.525,31.516) ; U7.B1 9.684,38.042 C9.2 8.675,39.225 8.1,39.8 6.4,39.8 ; v2(12.3,21.2) 19.4,21.2 21.725,23.525 v2(21.725,25.075) 22.125,25.075 30.8,16.4 32.4,16.4 35.8,13 35.8,12.5 ; v2(13.625,30.325) 13.625,30.27 C22.1 ; U7.A22 16.117,37.983 15.585,38.515 C8.1 14.9,39.3 13.4,40.8 13.4,41.5 12.4,42.5 9.1,42.5 6.4,39.8 ; C20.1 18.288,29.79 J3.1
  Top Layer w0.4: 37.4,39.59 J2.1 ; 37.55,23.55 40.56,20.54 J2.16 ; 37.775,34.525 40.33,31.97 J2.7 ; 37.825,38.075 40.12,35.78 J2.4 ; 37.85,30.35 40.04,28.16 J2.10 ; 37.925,26.675 40.25,24.35 J2.13
  Bottom Layer w0.254: v2(9.525,31.516) 8.708,30.7 v2(5.45,30.7) 5.45,28.05 v2(12.3,21.2) ; J3.1 14.272,29.678 v2(13.625,30.325) 15.1,31.8 20.225,31.8 21.725,30.3 v2(21.725,25.075)
+5V: J2.2 J2.5 J2.8 J2.11 J2.14 J2.17 U4.6 U6.6 | length 19.7
  Top Layer w0.4: v2(39.75,19.25) 39.77,19.27 J2.17 ; v2(39.75,23.25) 39.92,23.08 J2.14 ; v2(39.75,27) 39.86,26.89 J2.11 ; v2(39.75,30.75) 39.8,30.7 J2.8 ; v2(39.75,34.5) 39.76,34.51 J2.5 ; v2(39.75,38.5) 39.93,38.32 J2.2
  other v1: 26.35,11.3 27.05,11.3 26.7,12 26.35,12.7 27.05,12.7 26.7,13.4 39.3,14.8 39.3,16.2
+5V_REG: C6.2 U2.2 U6.1
ANT: C16.1 L1.2 | length 35.3
  Top Layer w0.127: L1.2 22.573,35.769 C16.1 ; C16.1@22.692,35.4 C16.1@22.717,35.375
  Top Layer w0.254: C16.1@22.717,35.375 22.759,35.417 22.759,44.162 24.977,44.162 24.977,41.218 27.034,41.218 27.034,44.162 29.015,44.162 29.015,41.193 30.971,41.193 30.971,44.162 32.851,44.162 32.851,41.198
GND: C1.1 C2.1 C3.1 C4.1 C5.1 C6.1 C7.1 C8.2 C9.1 C10.2 C11.2 C12.2 C13.1 C14.2 C15.1 C16.2 C17.1 C18.1 C19.1 C20.2 C21.1 C22.2 J2.19 J2.20 J2.21 J2.22 J2.23 J2.24 J2.25 J2.26 J2.27 J2.28 J2.29 J2.30 J2.31 J2.32 J2.33 J2.34 J2.35 J2.36 J3.2 J3.3 J3.5 J5.5 J6.2 J6.3 SW1.2 SW3.1 U1.1 U2.1 U3.2 U4.2 U5.2 U6.2 U7.B7 U7.F23 X1.1 X1.3
  other v1: 1.3,-1.1 2.6,-1.1 3.9,-1.1 5.2,-1.1 6.5,-1.1 7.8,-1.1 9.1,-1.1 10.4,-1.1 11.7,-1.1 13,-1.1 14.3,-1.1 15.6,-1.1 16.9,-1.1 18.2,-1.1 19.5,-1.1 20.8,-1.1 22.1,-1.1 23.4,-1.1 24.7,-1.1 26,-1.1 27.3,-1.1 28.6,-1.1 29.9,-1.1 31.2,-1.1 32.5,-1.1 33.8,-1.1 35.1,-1.1 36.4,-1.1 37.7,-1.1 39,-1.1 40.3,-1.1 41.6,-1.1 42.9,-1.1 44.2,-1.1 45.5,-1.1 46.8,-1.1 1.3,0.2 2.6,0.2 3.9,0.2 5.2,0.2 6.5,0.2 7.8,0.2 9.1,0.2 42.9,0.2 44.2,0.2 45.5,0.2 46.8,0.2 1.3,1.5 2.6,1.5 9.1,1.5 45.5,1.5 46.8,1.5 1.3,2.8 2.6,2.8 9.1,2.8 45.5,2.8 46.8,2.8 1.3,4.1 5.2,4.1 18.2,4.1 19.5,4.1 26,4.1 27.3,4.1 46.8,4.1 1.3,5.4 5.2,5.4 14.3,5.4 18.2,5.4 26,5.4 27.3,5.4 46.8,5.4 1.3,6.7 5.2,6.7 20.8,6.7 26,6.7 27.3,6.7 46.8,6.7 1.3,8 5.2,8 16.9,8 18.2,8 19.5,8 20.8,8 22.1,8 23.4,8 24.7,8 26,8 27.3,8 32.5,8 33.8,8 35.1,8 36.4,8 37.7,8 39,8 46.8,8 1.3,9.3 2.6,9.3 3.9,9.3 5.2,9.3 14.3,9.3 23.4,9.3 39,9.3 46.8,9.3 1.3,10.6 2.6,10.6 3.9,10.6 5.2,10.6 9.1,10.6 10.4,10.6 23.4,10.6 46.8,10.6 3.9,11.9 5.2,11.9 9.1,11.9 13,11.9 14.3,11.9 23.4,11.9 46.8,11.9 3.9,13.2 5.2,13.2 14.3,13.2 23.4,13.2 46.8,13.2 46.8,14.5 35.1,15.8 46.8,15.8 35.1,17.1 46.8,17.1 16.9,18.4 18.2,18.4 19.5,18.4 20.8,18.4 22.1,18.4 23.4,18.4 24.7,18.4 26,18.4 27.3,18.4 35.1,18.4 45.5,18.4 46.8,18.4 35.1,19.7 45.5,19.7 46.8,19.7 7.8,21 9.1,21 10.4,21 35.1,21 45.5,21 46.8,21 7.8,22.3 27.3,22.3 28.6,22.3 29.9,22.3 35.1,22.3 45.5,22.3 46.8,22.3 26,23.6 27.3,23.6 28.6,23.6 29.9,23.6 35.1,23.6 45.5,23.6 46.8,23.6 1.3,24.9 2.6,24.9 3.9,24.9 27.3,24.9 28.6,24.9 29.9,24.9 35.1,24.9 45.5,24.9 46.8,24.9 1.3,26.2 2.6,26.2 28.6,26.2 35.1,26.2 45.5,26.2 46.8,26.2 1.3,27.5 2.6,27.5 23.4,27.5 35.1,27.5 45.5,27.5 46.8,27.5 1.3,28.8 2.6,28.8 23.4,28.8 24.7,28.8 35.1,28.8 45.5,28.8 46.8,28.8 1.3,30.1 2.6,30.1 27.3,30.1 28.6,30.1 35.1,30.1 45.5,30.1 46.8,30.1 1.3,31.4 2.6,31.4 27.3,31.4 28.6,31.4 29.9,31.4 35.1,31.4 45.5,31.4 46.8,31.4 1.3,32.7 2.6,32.7 35.1,32.7 45.5,32.7 46.8,32.7 1.3,34 2.6,34 35.1,34 45.5,34 46.8,34 1.3,35.3 2.6,35.3 24.7,35.3 26,35.3 27.3,35.3 28.6,35.3 29.9,35.3 35.1,35.3 45.5,35.3 46.8,35.3 1.3,36.6 2.6,36.6 5.2,36.6 6.5,36.6 24.7,36.6 26,36.6 27.3,36.6 28.6,36.6 29.9,36.6 35.1,36.6 45.5,36.6 46.8,36.6 1.3,37.9 2.6,37.9 5.2,37.9 20.8,37.9 24.7,37.9 26,37.9 27.3,37.9 28.6,37.9 35.1,37.9 45.5,37.9 46.8,37.9 1.3,39.2 2.6,39.2 10.4,39.2 35.1,39.2 45.5,39.2 46.8,39.2 1.3,40.5 2.6,40.5 3.9,40.5 9.1,40.5 10.4,40.5 20.8,40.5 35.1,40.5 39,40.5 40.3,40.5 41.6,40.5 45.5,40.5 46.8,40.5 1.3,41.8 2.6,41.8 20.8,41.8 39,41.8 40.3,41.8 41.6,41.8 42.9,41.8 44.2,41.8 45.5,41.8 46.8,41.8 1.3,43.1 2.6,43.1 7.8,43.1 13,43.1 14.3,43.1 15.6,43.1 16.9,43.1 19.5,43.1 20.8,43.1 40.3,43.1 41.6,43.1 42.9,43.1 44.2,43.1 45.5,43.1 46.8,43.1 1.3,44.4 2.6,44.4 6.5,44.4 7.8,44.4 9.1,44.4 10.4,44.4 11.7,44.4 13,44.4 14.3,44.4 15.6,44.4 16.9,44.4 18.2,44.4 19.5,44.4 20.8,44.4 35.1,44.4 39,44.4 40.3,44.4 41.6,44.4 42.9,44.4 44.2,44.4 45.5,44.4 46.8,44.4
  other v2: 16.6,38.4
  other v3: 12.067,32.559 13.267,32.559 14.121,32.559 12.067,33.597 13.267,33.597 14.121,33.597 15.667,33.851 12.067,35.121 13.267,35.121 14.467,35.121 15.667,35.121 12.067,36.159 13.267,36.159 14.467,36.159 15.667,36.159
  other v4: 24,6 5,43
NetC7_2: C7.2 U7.B5 | length 2.4
  Top Layer w0.127: C7.2 11.835,37.141 U7.B5
NetC10_1: C10.1 U7.A23 X1.4 | length 5.3
  Top Layer w0.127: C10.1 15.088,40.729 X1.4 16.7,40.175 17.3,39.575 17.3,38.292 U7.A23
NetC11_1: C11.1 U7.C1 | length 1.8
  Top Layer w0.127: C11.1 8.961,36.609 U7.C1
NetC12_1: C12.1 U7.B24 X1.2 | length 7.2
  Top Layer w0.127: U7.B24 17.117,37.598 18.6,39.081 18.6,40.025 ; X1.2 18.121,42.079 18.6,41.6 18.6,40.025 ; C12.1 18.925,40.35 18.6,40.025
NetC13_2: C13.2 U7.D2 X2.2 | length 5
  Top Layer w0.127: X2.2@8.573,35.257 9.566,36.25 11.008,36.25 U7.D2
  Top Layer w0.254: C13.2 6.712,35.133 X2.2
NetC14_1: C14.1 U7.D23 | length 3.3
  Top Layer w0.127: U7.D23 16.908,36.65 17.75,36.65 18.471,37.371 C14.1
NetC15_2: C15.2 L1.1 U7.H23 | length 3.9
  Top Layer w0.127: U7.H23 16.95,35.691 C15.2 18.749,35.769 L1.1
NetC17_2: C17.2 U7.F2 X2.1 | length 6
  Top Layer w0.127: X2.1@8.573,33.757 9.3,34.484 9.3,35.4 9.875,35.975 11.001,35.975 U7.F2
  Top Layer w0.254: C17.2 8.287,33.571 X2.1
NetC19_2: C19.2 U7.AC5 | length 5.8
  Top Layer w0.127: C19.2 8.187,29.212 8.525,29.55 8.525,30.125 8.825,30.425 9.575,30.425 10.625,31.475 11.733,31.475 U7.AC5
NetJ3_6: J3.6 R3.1 SW3.3 SW3.4 U7.AC13 U7.AC15 U7.AC17 U7.AC19 U7.AC21 | length 21.8
  Top Layer w0.127: R3.1@7.462,25.65 R3.1 9.024,25.85 SW3.3 ; U7.AC13 U7.AC15 U7.AC17 U7.AC19 U7.AC21 16.591,31.609 17.35,30.85 v2(18,30.85) ; SW3.4 16.343,24.957 17.8,23.5 19.3,23.5 19.67,23.87 J3.6
  Bottom Layer w0.127: v2(18,30.85) 20.275,30.85 20.85,30.275 20.85,25.2 20.248,24.598 J3.6
NetJ3_9: J3.9 U7.AA24 | length 6.3
  Top Layer w0.127: U7.AA24 18.466,32.109 20.525,30.05 20.525,29.263 J3.9
NetJ3_10: J3.10 U7.AC24 | length 3.5
  Top Layer w0.127: U7.AC24 18.066,31.609 19.67,30.005 J3.10
NFC_N: J4.2 U7.L24 | length 7.7
  Top Layer w0.127: U7.L24 17.662,34.609 v2(17.725,34.545)
  Bottom Layer w0.127: v2(17.725,34.545) 18.955,34.545 J4.2
NFC_P: J4.1 U7.J24 | length 10.2
  Top Layer w0.127: U7.J24 17.662,35.109 v2(17.725,35.172)
  Bottom Layer w0.127: v2(17.725,35.172) 17.998,34.9 19.1,34.9 22.475,31.525 24.425,31.525 25.1,30.85 J4.1
P0.1: J1.7 J1.30 U7.AD22 | length 27.4
  Top Layer w0.127: v2(16.117,27.117) U7.AD22
  Top Layer w0.254: J1.7 J1.30
  Bottom Layer w0.127: v2(16.117,27.117) 16.117,24.558 17.163,23.512 21.333,23.512 26.962,29.141 28.901,29.141 J1.7
P0.2: J1.1 J1.36 U7.A12 | length 21.9
  Top Layer w0.127: v2(13.2,39.4) 13.2,38.35 13.617,37.933 U7.A12
  Top Layer w0.254: J1.1 J1.36
  Bottom Layer w0.127: v2(13.2,39.4) 13.4,39.6 31.72,39.6 J1.1
P0.3: U7.B13
P0.4: J1.14 J1.23 U7.J1 | length 35.2
  Top Layer w0.127: v2(9.9,35.3) 10.091,35.109 U7.J1
  Top Layer w0.254: J1.14 J1.23
  Bottom Layer w0.1: v2(9.9,35.3) 11.6,33.6 11.6,25.772 16.232,21.14 29.79,21.14 J1.14
P0.6: J1.15 J1.22 U7.L1 | length 34.5
  Top Layer w0.127: v2(9.8,34.6) 9.809,34.609 U7.L1
  Top Layer w0.254: J1.15 J1.22
  Bottom Layer w0.1: v2(9.8,34.6) 11.35,33.05 11.35,25.598 16.108,20.84 30.76,20.84 J1.15
P0.8: J1.16 J1.21 U7.N1 | length 34
  Top Layer w0.127: v2(9.7,33.9) 9.909,34.109 U7.N1
  Top Layer w0.254: J1.16 J1.21
  Bottom Layer w0.1: v2(9.7,33.9) 11.1,32.5 11.1,25.424 15.984,20.54 J1.16
P0.12: J1.18 J1.19 U7.U1 | length 34.3
  Top Layer w0.127: v2(9.7,32.5) 10.309,33.109 U7.U1
  Top Layer w0.254: J1.18 J1.19
  Bottom Layer w0.1: v2(9.7,32.5) 10.5,31.7 10.5,25.175 15.735,19.94 29.79,19.94 J1.18
P0.13: J1.13 J1.24 U7.AD8 | length 31.6
  Top Layer w0.127: v2(12.2,26) 12.2,30.692 U7.AD8
  Top Layer w0.254: J1.13 J1.24
  Bottom Layer w0.127: v2(12.2,26) 12.2,25.7 16.35,21.55 22.146,21.55 27.775,27.179 28.901,27.179 J1.13
P0.15: J1.12 J1.25 U7.AD10 | length 30.6
  Top Layer w0.127: v2(12.7,26.675) 12.7,30.692 U7.AD10
  Top Layer w0.254: J1.12 J1.25
  Bottom Layer w0.127: v2(12.7,26.675) 12.7,25.663 16.486,21.877 22.011,21.877 27.64,27.506 29.844,27.506 J1.12
P0.17: J1.11 J1.26 U7.AD12 | length 29.6
  Top Layer w0.127: v2(13.175,27.325) 13.175,30.667 U7.AD12
  Top Layer w0.254: J1.11 J1.26
  Bottom Layer w0.127: v2(13.175,27.325) 13.175,25.65 16.621,22.204 21.875,22.204 27.504,27.833 30.787,27.833 J1.11
P0.20: J1.10 J1.27 U7.AD16 | length 28
  Top Layer w0.127: U7.AD16 14.65,31.076 v2(14.65,26.8)
  Top Layer w0.254: J1.10 J1.27
  Bottom Layer w0.127: v2(14.65,26.8) 14.65,24.638 16.757,22.531 21.74,22.531 27.369,28.16 J1.10
P0.22: J1.9 J1.28 U7.AD18 | length 27.8
  Top Layer w0.127: U7.AD18 15.125,31.101 v2(15.125,27.35)
  Top Layer w0.254: J1.9 J1.28
  Bottom Layer w0.127: v2(15.125,27.35) 15.125,24.625 16.892,22.858 21.604,22.858 27.233,28.487 30.787,28.487 J1.9
P0.24: J1.8 J1.29 U7.AD20 | length 27.6
  Top Layer w0.127: v2(15.6,27.925) 15.6,31.092 U7.AD20
  Top Layer w0.254: J1.8 J1.29
  Bottom Layer w0.127: v2(15.6,27.925) 15.6,24.613 17.028,23.185 21.469,23.185 27.098,28.814 29.844,28.814 J1.8
P0.26: U7.G1
P1.1: U7.Y23
P1.2: J1.6 J1.31 U7.W24 | length 16.1
  Top Layer w0.127: U7.W24 31.099,32.609 J1.6
  Top Layer w0.254: J1.6 J1.31
P1.3: U7.V23
P1.4: J1.5 J1.32 U7.U24 | length 16.6
  Top Layer w0.127: U7.U24 17.318,33.109 17.502,32.925 30.145,32.925 J1.5
  Top Layer w0.254: J1.5 J1.32
P1.5: U7.T23
P1.6: J1.4 J1.33 U7.R24 | length 17.1
  Top Layer w0.127: U7.R24 17.318,33.609 17.652,33.275 29.225,33.275 J1.4
  Top Layer w0.254: J1.4 J1.33
P1.7: U7.P23
P1.9: J1.17 J1.20 U7.R1 | length 34.1
  Top Layer w0.127: v2(9.7,33.2) 10.109,33.609 U7.R1
  Top Layer w0.254: J1.17 J1.20
  Bottom Layer w0.1: v2(9.7,33.2) 10.8,32.1 10.8,25.299 15.859,20.24 30.76,20.24 J1.17
P1.10: U7.A20
P1.11: U7.B19
P1.12: U7.B17
P1.13: J1.3 J1.34 U7.A16 | length 20.6
  Top Layer w0.127: v2(14.35,38.525) 14.617,38.258 U7.A16
  Top Layer w0.254: J1.3 J1.34
  Bottom Layer w0.127: v2(14.35,38.525) 14.771,38.946 29.834,38.946 J1.3
P1.14: U7.B15
P1.15: J1.2 J1.35 U7.A14 | length 21.2
  Top Layer w0.127: v2(13.8,39) 13.8,38.225 14.117,37.908 U7.A14
  Top Layer w0.254: J1.2 J1.35
  Bottom Layer w0.127: v2(13.8,39) 14.073,39.273 30.777,39.273 J1.2
USB_N: J5.2 U7.AD4 | length 19.7
  Top Layer w0.127: J5.2 4.914,17.025 5.075,16.863 5.638,16.863 6.4,17.625 6.4,23.225 7.375,24.2 7.471,24.296 10.008,24.296 11.275,25.562 11.275,30.767 U7.AD4
USB_P: J5.3 U7.AD6 | length 20.4
  Top Layer w0.127: J5.3 4.914,16.375 5.075,16.536 5.774,16.536 6.631,17.394 6.727,17.49 6.727,23.09 7.606,23.969 10.144,23.969 11.602,25.427 11.602,30.594 U7.AD6
VBUS: C1.2 C21.2 J5.1 R1.2 U3.1 U4.1 U7.AD2 | length 11.9
  Top Layer w0.127: v2(5,26.9) 6.9,26.9 9.362,29.362 C21.2 10,29.992 U7.AD2
  Bottom Layer w0.127: v2(5,23.2) v2(5,26.9)
  other v2: 20.4,12 18.3,12.7 19,12.7 19.7,12.7 20.4,12.7 7.8,18.3 7.8,19 3.6,19.7 5,19.7 3.6,20.4 4.3,20.4 5,20.4 3.6,21.1 4.3,21.1 5,21.1 3.6,21.8 4.3,21.8 5,21.8 5,22.5
VBUS_EN: R1.1 SW1.1 U3.3 U4.3 | length 18.3
  Top Layer w0.127: U3.3 10.49,17.11 10.9,16.7 10.9,12.4 12.75,10.55 SW1.1 16.45,9.95 U4.3
VDD: C2.2 C5.2 U1.3 U2.3 U3.6 U5.6
VIN: C4.2 J2.3 J2.6 J2.9 J2.12 J2.15 J2.18 J6.1 R2.2 U5.1 | length 10.2
  Bottom Layer w0.4: 41.25,18 J2.18 ; 41.25,29.5 41.32,29.43 J2.9 ; 41.25,33.25 41.26,33.24 J2.6 ; 41.25,37.25 41.45,37.05 J2.3 ; 41.5,22 41.69,21.81 J2.15 ; 41.5,25.5 41.62,25.62 J2.12
VIN_EN: R2.1 SW1.3 U5.3 U6.3 | length 39.1
  Top Layer w0.127: U5.3 10.019,12.981 10.6,12.4 10.6,11.662 12,10.262 R2.1 13.246,8.054 14.75,6.55 SW1.3 18.65,6.55 24.5,0.7 39.529,0.7 U6.3
pads on no net: J3.4 J3.7 J3.8 J5.4 SW1.M SW3.2 U3.4 U3.5 U4.4 U4.5 U5.4 U5.5 U6.4 U6.5 U7.A8 U7.A10 U7.A18 U7.AB2 U7.AC9 U7.AC11 U7.B3 U7.B9 U7.B11 U7.E24 U7.H2 U7.K2 U7.M2 U7.N24 U7.P2 U7.T2
copper on no net:
  other v4: 37,43

## Polygon pours and split planes (outlines as drawn)
GND on Top Layer "Signal Layer 1-No Net" (solid, pour order 55): 48,46 48,-2 0,-2 0,46
+5V on Top Layer "Signal Layer 1-No Net" (solid, pour order 51): 42.5,3.6 45.5,3.6 45.5,17 38.5,17 38.5,14 42.5,14
+5V on Top Layer "Signal Layer 1-No Net" (solid, pour order 47): 24.2,11.4 25.7,11.4 25.7,10.1 27.7,10.1 27.7,14 24.2,14
+3.3V on Top Layer "Signal Layer 1-No Net" (solid, pour order 45): 39.8,10.9 39.8,13.2 38.1,13.2 38.2,40.5 36.6,40.5 36.6,13.2 33.5,13.2 33.5,12.2 29.7,12.2 29.7,10.9 33.5,10.9 33.5,9.7 38.2,9.7 38.2,10.9
VBUS on Top Layer "Signal Layer 1-No Net" (solid, pour order 41): 22.7,11.4 22.7,12.7 21.5,12.7 21.5,13.9 17.2,13.9 17.2,10.7 21,10.7 21,11.4
VBUS on Top Layer "Signal Layer 1-No Net" (solid, pour order 39): 10.1,19.6 10.1,18.6 8.4,18.6 8.4,17.3 7.2,17.3 7.2,19.6
VBUS on Top Layer "Signal Layer 1-No Net" (solid, pour order 37): 3,17.475 5.8,17.475 5.8,24 3,24
VDD on Top Layer "Signal Layer 1-No Net" (solid, pour order 33): 11.3,14.4 11.3,15.5 13,15.5 13,18.6 11.3,18.6 11.3,19.5 15.5,19.5 15.5,16.5 29.5,16.5 29.5,10 31.9,10 31.9,8.6 29.5,8.6 29.5,3 32.3,3 32.3,1.3 29.2,1.3 28,1.3 28,14.4
VIN on Top Layer "Signal Layer 1-No Net" (solid, pour order 31): 13,4 13,7.3 10.6,7.3 10.6,9.2 8.3,9.2 8.3,14.4 10.2,14.4 10.2,15.5 6.3,15.5 6.3,15.2 6.3,4
+5V_REG on Top Layer "Signal Layer 1-No Net" (solid, pour order 23): 41.575,3.6 41.55,3.625 41.55,6.35 35.8,6.35 32.7,6.35 32.7,5.1 29.8,5.1 29.8,3.8 32.7,3.8 32.7,2.6 35.8,2.6 38.2,2.6 38.2,3.6
GND on Bottom Layer "Signal Layer 1-No Net" (solid, pour order 53): 48,46 48,-2 0,-2 0,46
+5V on Bottom Layer "Signal Layer 1-No Net" (solid, pour order 49): 25.7,10.1 40.1,10.1 40.1,39.2 38.5,39.2 38.5,14 25.7,14
VIN on Bottom Layer "Signal Layer 1-No Net" (solid, pour order 43): 8.3,9.2 13,9.2 13,3 40.548,3 40.548,37.6 42,37.6 42,3 42,0.5 10.5,0.5 10.5,4 8.3,4
VBUS on Bottom Layer "Signal Layer 1-No Net" (solid, pour order 35): 3,17.3 13.2,17.3 13.2,13.9 17.2,13.9 17.2,11.4 21.5,11.4 21.5,15.1 14.7,15.1 14.7,19.6 7,19.6 7,20.5 5.8,20.5 5.8,24 3,24 3,20.5

## Other copper
Top Layer:
  pour cut-out: 34,40.5 23.5,40.5 23.5,36 21.5,36 21.5,40.5 21.5,45 34,45
Bottom Layer:
  pour cut-out: 34,40.5 23.5,40.5 23.5,36 21.5,36 21.5,40.5 21.5,45 34,45

## Silkscreen, mask and mechanical layers (free items; w line width, h text height)
Top Overlay:
  text "P0.2" at 29.25,39.321 h0.9
  text "3.3V" at 45.373,39.321 h0.9
  text "P1.15" at 28.83,38.051 h0.9
  text "5V" at 45.373,38.051 h0.9
  text "P1.13" at 28.812,36.781 h0.9
  text "VIN" at 45.373,36.781 h0.9
  text "P1.6" at 29.245,35.511 h0.9
  text "3.3V" at 45.373,35.511 h0.9
  text "P1.4" at 29.228,34.241 h0.9
  text "5V" at 45.373,34.241 h0.9
  text "P1.2" at 29.25,32.971 h0.9
  text "VIN" at 45.373,32.971 h0.9
  text "P0.1" at 29.252,31.701 h0.9
  text "3.3V" at 45.373,31.701 h0.9
  text "P0.24" at 28.793,30.431 h0.9
  text "5V" at 45.373,30.431 h0.9
  text "P0.22" at 28.815,29.161 h0.9
  text "VIN" at 45.373,29.161 h0.9
  text "P0.20" at 28.8,27.891 h0.9
  text "3.3V" at 45.373,27.891 h0.9
  text "P0.17" at 28.807,26.621 h0.9
  text "5V" at 45.373,26.621 h0.9
  text "P0.15" at 28.83,25.351 h0.9
  text "VIN" at 45.373,25.351 h0.9
  text "P0.13" at 28.812,24.081 h0.9
  text "3.3V" at 45.373,24.081 h0.9
  text "P0.4" at 29.228,22.811 h0.9
  text "5V" at 45.373,22.811 h0.9
  text "P0.6" at 29.245,21.541 h0.9
  text "VIN" at 45.373,21.541 h0.9
  text "P0.8" at 29.25,20.271 h0.9
  text "3.3V" at 45.373,20.271 h0.9
  text "P1.9" at 29.243,19.001 h0.9
  text "5V" at 45.373,19.001 h0.9
  text "P0.12" at 28.815,17.731 h0.9
  text "VIN" at 45.373,17.731 h0.9
  text "GND" at 44.001,16.897 h0.9 r270
  text "a" at 13.5,15.3 h5
  text "VIN=7-12V" at 13.4,1.1 h2.5
Top Paste:
  pour cut-out: 34,40.5 23.5,40.5 23.5,36 21.5,36 21.5,40.5 21.5,45 34,45
Top Solder:
  pour cut-out: 34,40.5 23.5,40.5 23.5,36 21.5,36 21.5,40.5 21.5,45 34,45

## Dimensions
33,37.05 to 33,35.78 on Top Overlay
43,39.59 to 44.27,39.59 on Top Overlay
33,18 to 43,18 on Top Overlay